# EAGLE board tin_of_fets (EAGLE 7.7.0)
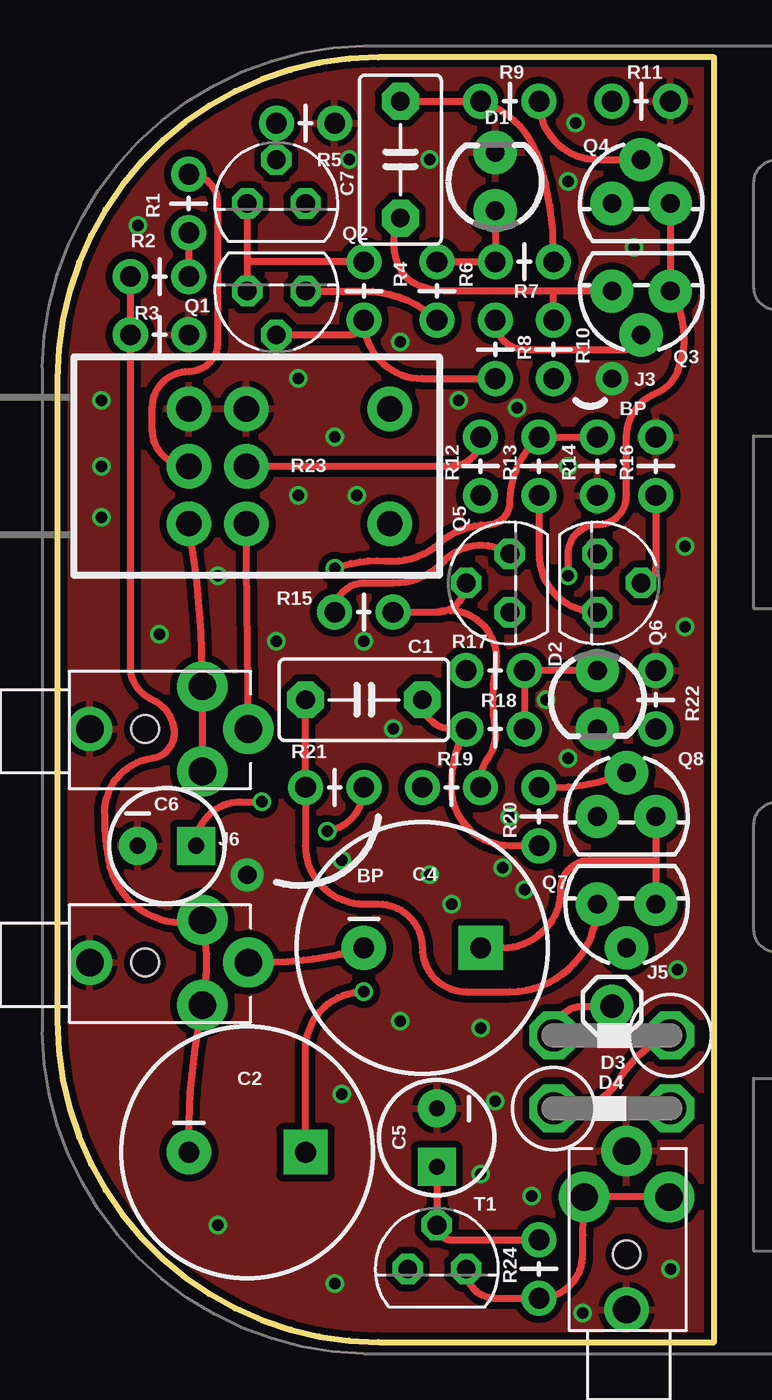
[diagram p0: board, top side]
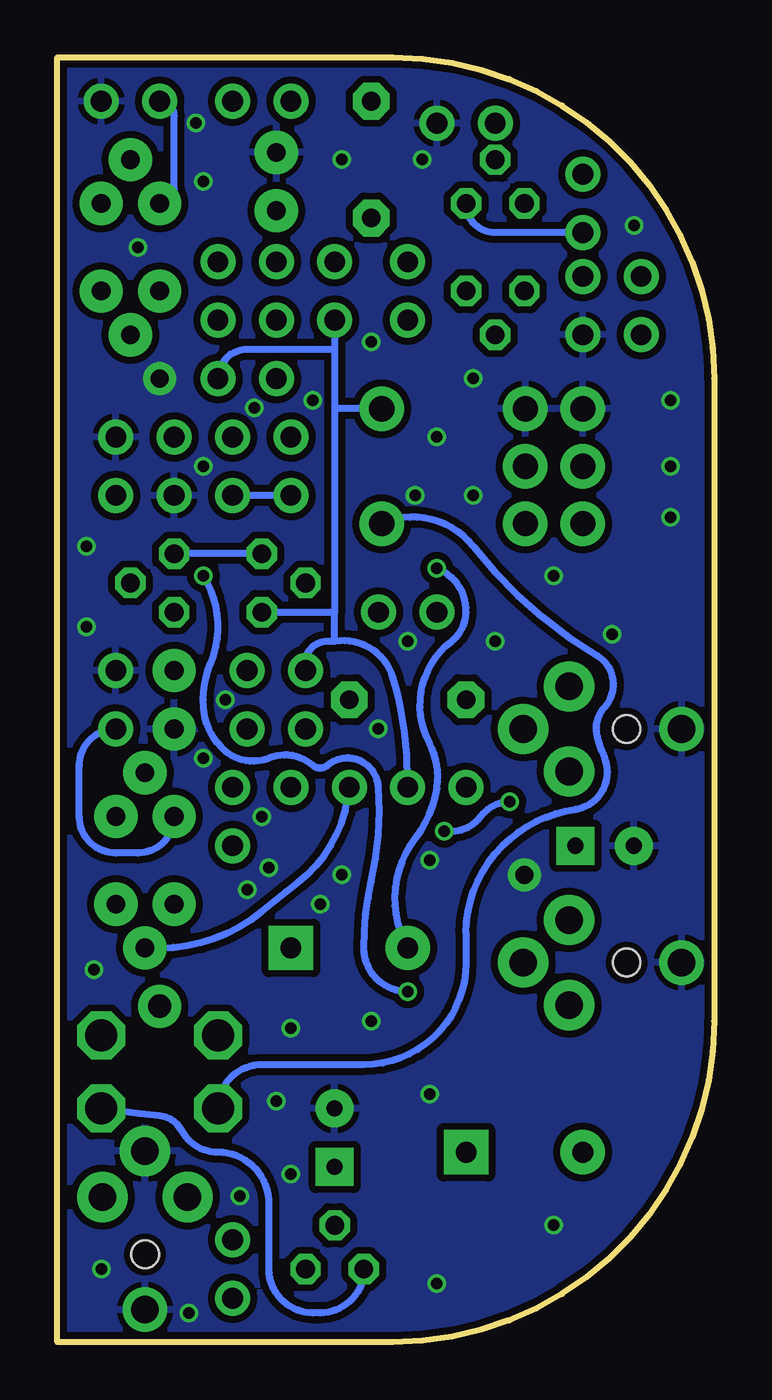
[diagram p1: board, bottom side, seen from below]

Size 28.57 x 55.88 mm. Coordinates in mm from the lower left corner, seen from the top.
Outline: 28.57,0 28.57,55.88 13.97,55.88 arc90 0,41.91 0,13.97 arc90 13.97,0 28.57,0
Copper layers (1*16): Top 0.035mm / dielectric 1.5mm / Bottom 0.035mm
Design rules "SeeedStudio_2layer_DRU_no_angle_20140221 *": minimum track width 12mil, minimum drill 12mil, track to track 12mil, track to pad 12mil, pad to pad 12mil, via to via 12mil, smd to smd 0mil, copper to edge 12mil, drill to drill 12mil, minimum pad ring 10mil, minimum via ring 6mil, stop-mask expansion 2mil, vias tented up to drill 100mil, thermal gap 10mil

## Footprints (pad centres in the part's own frame; a part is rotated, then mirrored left to right if it is on the bottom)
C5B3.5 = drill 0.813 pad 1.6 octagon: 1 -2.54,0; 2 2.54,0
CPOL-RADIAL-1000UF-25V = drill 0.9 pad 1.93 square: + 2.54,0 | drill 0.9 pad 1.93: - -2.54,0
CPOL-RADIAL-10UF-25V = drill 0.7 pad 1.651 square: 1 1.27,0 | drill 0.7 pad 1.651: 2 -1.27,0
LED3MM = drill 0.813 pad 1.88: A -1.27,0; K 1.27,0
C1702-05 = drill 1.397 octagon: A 2.54,0; C -2.54,0
STEREOJACK2.5MM_STEREOJACK2.5MM = drill 1.2 pad 2.184: RING 4.5,0; TIP1 2.5,1.85; TIP2 2.5,-1.85 | drill 1.2 pad 1.93: SHIELD -2.4,0 | hole 1.2: 0,0
PAD-NO-THERMAL = drill 0.8 pad 1.422: P$1 0,0
1X01 = drill 1.016 pad 1.88: 1 0,0
TO92 = drill 0.813 octagon: 1 1.27,0; 2 0,1.905; 3 -1.27,0
TO-92 = drill 0.813 pad 1.88: 1 -1.27,0; 2 0,1.905; 3 1.27,0
AXIAL-0.1-SM = drill 0.9 pad 1.524: P$1 0,0; P$2 2.54,0
PTR902 = drill 1.1 pad 1.93: R1.1 0,-2.5; R1.2 0,0; R1.3 0,2.5; R2.1 -2.5,-2.5; R2.2 -2.5,0; R2.3 -2.5,2.5; SW1 -8.75,-2.5; SW2 -8.75,2.5

## Placement (x,y rotation side)
A1  9V-BATTERY-DOCU  [9V-BATTERY-DIM]  57.79,41.91 0 top  (outside the outline)
A2  9V-BATTERY-DOCU  [9V-BATTERY-DIM]  57.79,13.97 0 top  (outside the outline)
A3  ALTOIDS-DOCU  [ALTOIDS-INNER-DIM]  45.09,27.94 0 top  (outside the outline)
C1  0.47uF  [C5B3.5]  13.34,27.94 0 top
C2  470u  [CPOL-RADIAL-1000UF-25V]  8.26,8.26 0 top
C4  470u  [CPOL-RADIAL-1000UF-25V]  15.88,17.14 0 top
C5  47u  [CPOL-RADIAL-10UF-25V]  16.51,8.89 270 top
C6  10uF  [CPOL-RADIAL-10UF-25V]  4.76,21.59 0 top
C7  0.47uF  [C5B3.5]  14.92,51.44 90 top
D1  BLUE  [LED3MM]  19.05,50.48 90 top
D2  BLUE  [LED3MM]  23.49,27.94 270 top
D3  [C1702-05]  24.13,10.16 0 top
D4  [C1702-05]  24.13,13.34 180 top
J1  [STEREOJACK2.5MM_STEREOJACK2.5MM]  3.81,26.67 0 top
J2  [STEREOJACK2.5MM_STEREOJACK2.5MM]  3.81,16.51 0 top
J3  PAD-NO-THERMAL  [PAD-NO-THERMAL]  24.13,41.91 0 top
J4  [STEREOJACK2.5MM_STEREOJACK2.5MM]  24.76,3.81 90 top
J5  [1X01]  24.13,14.61 0 top
J6  PAD-NO-THERMAL  [PAD-NO-THERMAL]  8.26,20.32 0 top
Q1  J112  [TO92]  9.53,45.72 180 top
Q2  J112  [TO92]  9.53,49.53 0 top
Q3  ZVN4306A  [TO-92]  25.4,45.72 180 top
Q4  ZVN4306A  [TO-92]  25.4,49.53 0 top
Q5  J112  [TO92]  19.68,33.02 90 top
Q6  J112  [TO92]  23.49,33.02 270 top
Q7  ZVN4306A  [TO-92]  24.76,19.05 180 top
Q8  ZVN4306A  [TO-92]  24.76,22.86 0 top
R1  680  [AXIAL-0.1-SM]  5.71,48.26 90 top
R2  3.3k  [AXIAL-0.1-SM]  3.17,46.35 0 top
R3  100k  [AXIAL-0.1-SM]  5.71,43.81 180 top
R4  4.7k  [AXIAL-0.1-SM]  13.34,46.99 270 top
R5  4.7k  [AXIAL-0.1-SM]  12.06,53.02 180 top
R6  4.7k  [AXIAL-0.1-SM]  16.51,46.99 270 top
R7  1Meg  [AXIAL-0.1-SM]  21.59,46.99 180 top
R8  100  [AXIAL-0.1-SM]  19.05,44.45 270 top
R9  100  [AXIAL-0.1-SM]  20.95,53.98 180 top
R10  6.8  [AXIAL-0.1-SM]  21.59,44.45 270 top
R11  6.2  [AXIAL-0.1-SM]  26.67,53.98 180 top
R12  680  [AXIAL-0.1-SM]  18.41,36.83 90 top
R13  3.3k  [AXIAL-0.1-SM]  20.95,39.37 270 top
R14  100k  [AXIAL-0.1-SM]  23.49,36.83 90 top
R15  4.7k  [AXIAL-0.1-SM]  12.06,31.75 0 top
R16  4.7k  [AXIAL-0.1-SM]  26.04,39.37 270 top
R17  4.7k  [AXIAL-0.1-SM]  20.32,29.21 180 top
R18  1Meg  [AXIAL-0.1-SM]  17.78,26.67 0 top
R19  100  [AXIAL-0.1-SM]  15.88,24.13 0 top
R20  100  [AXIAL-0.1-SM]  20.95,24.13 270 top
R21  6.8  [AXIAL-0.1-SM]  10.79,24.13 0 top
R22  6.2  [AXIAL-0.1-SM]  26.04,29.21 270 top
R23  PTR90  [PTR902]  5.71,38.1 180 top
R24  2.2k  [AXIAL-0.1-SM]  20.95,4.45 270 top
T1  ZTX694B  [TO92]  16.51,3.17 0 top

## Library data of the parts
A1-A3 J3 J6 R23 = my
C1 C7 = capacitor-wima
C2 C4-C6 = SparkFun-Capacitors
D1 D2 = SparkFun-LED; PROD_ID: DIO-08794
D3 D4 = diode
J1 J2 J4 = my-conn
J5 = SparkFun-Connectors
Q1 Q2 Q5 Q6 = transistor-fet
Q3 Q4 Q7 Q8 = SparkFun-DiscreteSemi
R1-R22 R24 = my-res
T1 = transistor-neu-to92

## Nets
+12V: J4.TIP1 J4.TIP2 R24.P$2 T1.1
GND: C5.2 C6.2 D1.K D2.K J1.SHIELD J2.SHIELD J3.P$1 J4.RING J4.SHIELD J6.P$1 R3.P$1 R5.P$1 R11.P$1 R14.P$1 R16.P$1 R22.P$1 R23.R1.1 R23.R2.1
IN_L: R1.P$2 R23.R1.2
IN_L*: J1.TIP1 J1.TIP2 R23.R1.3
IN_R: R12.P$2 R23.R2.2
IN_R*: J1.RING R23.R2.3
N$1: Q1.2 R4.P$2 R8.P$2
N$2: Q1.1 Q2.3 R4.P$1
N$3: Q2.2 R5.P$2
N$4: Q5.2 R15.P$2 R19.P$2
N$5: Q3.2 R8.P$1
N$6: Q2.1 R1.P$1 R2.P$2
N$7: Q5.1 Q6.3 R15.P$1
N$8: Q4.2 R9.P$1
N$10: Q4.1 R11.P$2
N$11: C7.1 Q3.3 R10.P$1
N$12: Q6.2 R16.P$2
N$13: C7.2 R7.P$1 R9.P$2
N$14: D1.A R6.P$1 R7.P$2
N$15: Q6.1 R12.P$1 R13.P$2
N$16: Q7.2 R19.P$1
N$17: Q8.2 R20.P$1
N$19: Q8.1 R22.P$2
N$20: C1.1 Q7.3 R21.P$1
N$21: C1.2 R18.P$1 R20.P$2
N$22: D2.A R17.P$1 R18.P$2
N$23: D3.A T1.3
N$24: C5.1 R24.P$1 T1.2
OUT_L: C2.- J2.TIP1 J2.TIP2 R2.P$1 R3.P$2
OUT_L*: C2.+ Q3.1 Q4.3
OUT_R: C4.- J2.RING R13.P$1 R14.P$2
OUT_R*: C4.+ Q7.1 Q8.3
VBAT: D4.A J5.1
VCC: C6.1 Q1.3 Q5.3 R6.P$2 R10.P$2 R17.P$2 R21.P$2 R23.SW1
VCC*: D3.C D4.C R23.SW2

## Tracks (layer width: path | path; a pad name or v marks a point on that pad's centre or on a via)
+12V
  Top 0.305: T1.1 arc90 19.05,1.91 R24.P$2 arc90 22.86,3.81 arc-3 J4.TIP1 J4.TIP2
GND  (via drill 0.5)
  other vias: 17.14,19.05 16.19,20.32 4.45,30.8 6.99,33.34 10.48,36.83 27.3,31.11 27.3,34.61 10.48,41.91 12.06,39.37 1.91,38.1 3.49,48.58 25.08,47.62 18.41,13.65 14.92,13.97 18.41,7.3 13.02,36.83 19.68,22.86 21.27,27.94 20,40.64 17.46,40.96 22.22,25.4 20.32,19.68 19.37,20.64 12.38,10.79 19.05,10.48 12.38,20.95 13.34,30.48 14.92,43.5 22.54,53.02 1.91,40.96 1.91,35.88 22.22,50.48 16.19,51.44 12.7,51.44 22.22,38.1 6.99,5.08 12.06,2.54 20.64,6.35 26.67,3.17 26.99,16.19 22.86,1.27 14.61,26.67 9.53,30.48
  pour Top: 28.57,55.88 -0.64,55.88 -0.64,0 28.57,0
  pour Bottom: 28.57,55.88 28.57,0 -0.64,0 -0.64,55.88
IN_L
  Top 0.305: R23.R1.2 arc-90 4.13,39.69 4.13,40.64 arc-90 5.71,42.23 arc90 6.99,43.5 6.99,49.53 arc90 R1.P$2
IN_L*
  Top 0.305: J1.TIP2 J1.TIP1 arc10 R23.R1.3
IN_R
  Top 0.305: R23.R2.2 17.14,38.1 arc90 R12.P$2
IN_R*
  Top 0.305: J1.RING R23.R2.3
N$1
  Top 0.305: Q1.2 12.7,43.81 arc90 R4.P$2 arc90 15.88,41.91 R8.P$2
N$2
  Top 0.305: Q2.3 8.26,46.99 | 8.26,46.99 Q1.1 | R4.P$1 8.26,46.99
N$3
  Top 0.305: Q2.2 R5.P$2
N$4
  Top 0.305: R15.P$2 16.51,31.75 | 16.51,31.75 arc90 Q5.2 | 16.51,31.75 arc-118 19.05,29.21 arc18 19.05,26.67 arc-46 18.73,25.4 arc37 18.41,24.45 R19.P$2
N$5
  Top 0.305: R8.P$1 arc90 20.32,43.18 24.76,43.18 arc90 Q3.2
N$6
  Top 0.305: R1.P$1 R2.P$2
  Bottom 0.305: R1.P$1 9.53,48.26 arc90 Q2.1
N$7
  Top 0.305: R15.P$1 arc-90 13.34,33.02 14.61,33.02 arc46 16.83,33.97 arc-80 Q5.1
  Bottom 0.305: Q5.1 Q6.3
N$8
  Top 0.305: R9.P$1 arc90 23.49,51.44 Q4.2
N$10
  Bottom 0.305: Q4.1 arc-90 23.49,50.16 23.49,53.34 arc-90 R11.P$2
N$11
  Top 0.305: Q3.3 21.59,45.72 | 21.59,45.72 16.83,45.72 arc-28 15.56,46.04 arc-34 14.92,46.67 arc-56 C7.1 | R10.P$1 21.59,45.72
N$12
  Top 0.305: R16.P$2 26.04,33.66 arc-90 Q6.2
N$13
  Top 0.305: C7.2 R9.P$2 arc-55 20.95,51.44 arc-17 21.59,47.31 R7.P$1
N$14
  Top 0.305: R6.P$1 R7.P$2 D1.A
N$15
  Top 0.305: R13.P$2 20.95,34.29 arc90 Q6.1
  Bottom 0.305: R12.P$1 R13.P$2
N$16
  Bottom 0.305: Q7.2 24.13,17.14 arc-39 19.68,18.73 arc1 18.1,20 arc-47 R19.P$1
N$17
  Top 0.305: R20.P$1 21.59,24.13 arc23 Q8.2
N$19
  Bottom 0.305: Q8.1 arc90 25.08,21.27 26.04,21.27 arc90 27.62,22.86 27.62,25.08 arc90 R22.P$2
N$20
  Top 0.305: Q7.3 arc-90 19.68,15.24 17.78,15.24 arc-90 15.88,17.14 arc90 13.97,19.05 13.34,19.05 arc-90 10.79,21.59 R21.P$1 C1.1
N$21
  Top 0.305: R20.P$2 19.68,21.59 arc-90 17.14,24.13 arc-28 R18.P$1 17.14,26.67 arc-90 C1.2
N$22
  Top 0.305: D2.A R17.P$1 R18.P$2
N$23
  Bottom 0.305: T1.3 arc90 17.14,1.27 17.46,1.27 arc90 19.37,3.17 19.37,6.03 arc-90 21.59,8.26 arc62 23.18,9.21 arc-56 24.13,9.84 arc3 D3.A
N$24
  Top 0.305: C5.1 T1.2 arc90 17.14,4.45 R24.P$1
OUT_L
  Top 0.305: R2.P$1 R3.P$2 3.17,29.21 arc57 4.13,27.94 arc-57 5.08,26.67 arc-90 4.13,25.4 arc82 2.04,23 arc10 2.22,20.95 arc95 J2.TIP1 arc-24 J2.TIP2 arc12 5.71,8.89 C2.-
OUT_L*  (via drill 0.5)
  Top 0.305: Q4.3 Q3.1 arc-56 26.99,42.23 arc-45 26.04,41.27 arc67 24.76,39.37 24.76,36.83 arc-90 23.49,35.56 arc90 22.22,34.29 v22.22,33.34 | C2.+ 10.79,12.7 arc-90 v13.34,15.24
  Bottom 0.305: v13.34,15.24 arc90 15.24,17.14 arc13 14.92,20 arc-17 14.61,24.13 arc-82 15.88,25.4 arc-45 16.83,25.08 arc82 17.46,25.08 arc-63 19.37,25.4 arc63 21.27,25.72 arc45 22.22,27.62 arc27 21.91,29.53 arc-55 v22.22,33.34
OUT_R  (via drill 0.5)
  Top 0.305: R14.P$2 R13.P$1 arc47 19.68,36.51 arc-89 18.73,35.56 arc36 16.83,34.92 arc-50 14.29,33.97 arc25 v12.06,33.66 | J2.RING 8.89,16.51 arc16 C4.-
  Bottom 0.305: v12.06,33.66 arc71 10.79,31.75 arc51 11.43,30.48 arc-80 12.38,26.04 arc37 12.06,24.13 arc28 13.02,21.91 arc-67 C4.-
OUT_R*
  Top 0.305: Q8.3 26.04,20.95 | 26.04,20.95 Q7.1 | C4.+ 19.37,17.14 arc90 21.91,19.68 arc-90 23.18,20.95 26.04,20.95
VBAT
  Top 0.305: D4.A arc-90 22.86,14.61 J5.1
VCC  (via drill 0.5)
  Top 0.305: C6.1 arc-90 7.94,23.5 v8.89,23.5 | v11.75,22.23 arc81 R21.P$2 | Q1.3 13.34,45.72 arc-44 R6.P$2
  Bottom 0.305: 16.51,43.18 20.32,43.18 arc-90 R10.P$2 | R6.P$2 16.51,43.18 | 16.51,43.18 16.51,40.64 | 16.51,40.64 16.51,31.75 | R23.SW1 16.47,40.6 arc90 16.51,40.64 | Q5.3 16.51,31.75 | v11.75,22.23 arc-63 10.16,22.86 arc53 v8.89,23.5 | 16.51,30.48 16.51,31.75 | 16.51,30.48 16.83,30.48 arc-106 R17.P$2 | R21.P$2 13.34,24.45 arc-11 13.65,27.62 arc-5 13.97,28.89 arc-83 16.51,30.48
VCC*
  Top 0.305: D3.C 22.22,10.16 arc59 24.45,11.43 arc-38 D4.C
  Bottom 0.305: D3.C arc90 19.68,12.06 15.24,12.06 arc-90 10.79,16.51 10.79,17.78 arc45 9.21,21.59 arc36 6.03,23.18 arc-104 4.76,25.4 arc7 5.08,26.35 arc58 4.76,27.62 arc-102 5.08,29.84 arc21 10.48,34.61 arc-76 R23.SW2

## Text on the board
tPlace: BP | BP